# Altium PCB BT_Programmer_Shield.PcbDoc
Units mil, origin at the board's own origin, x right, y up, seen from the top; angles counter-clockwise.
Board outline 2100 x 2700 mil, 2 copper layers (Top Layer, Bottom Layer), stack 42.17 mil thick; 45 components, 38 nets, 207 pads, 63 vias.
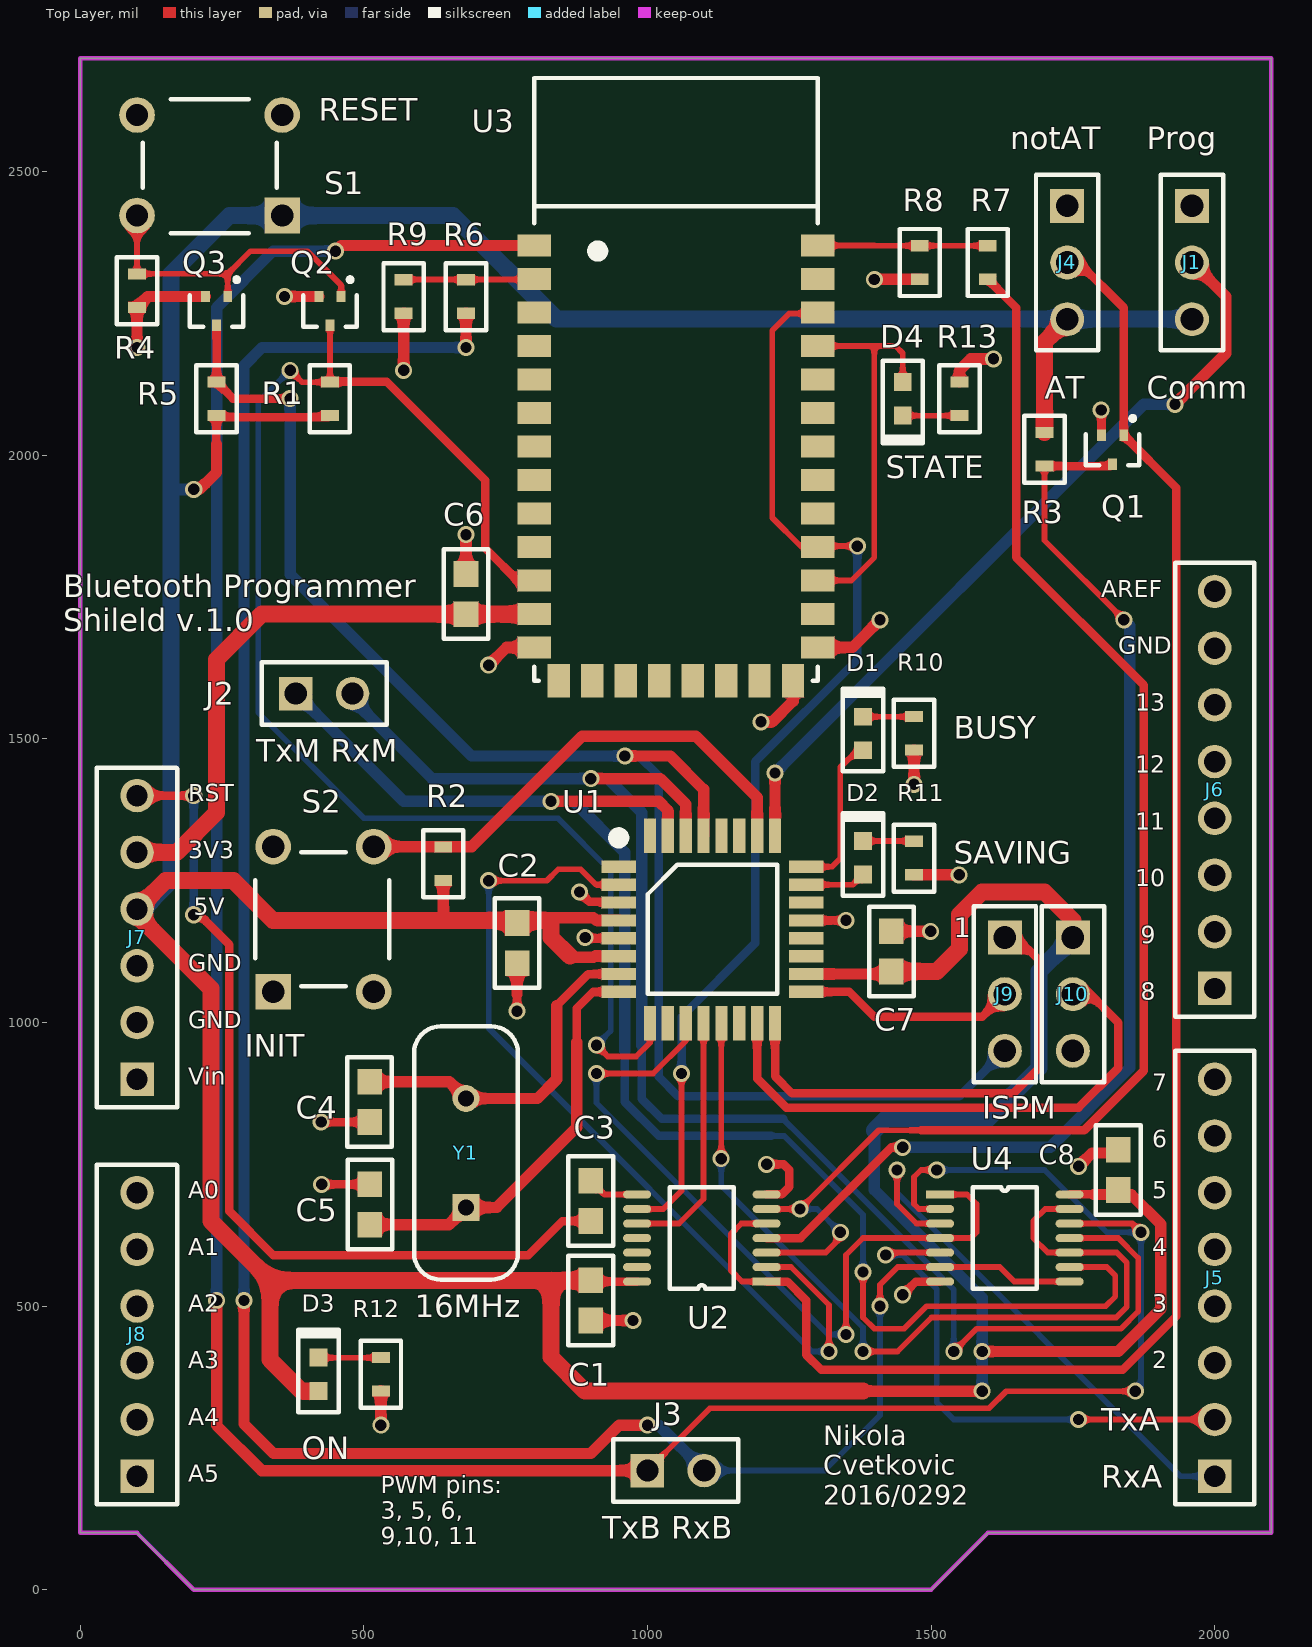
[diagram p0: Top Layer view]
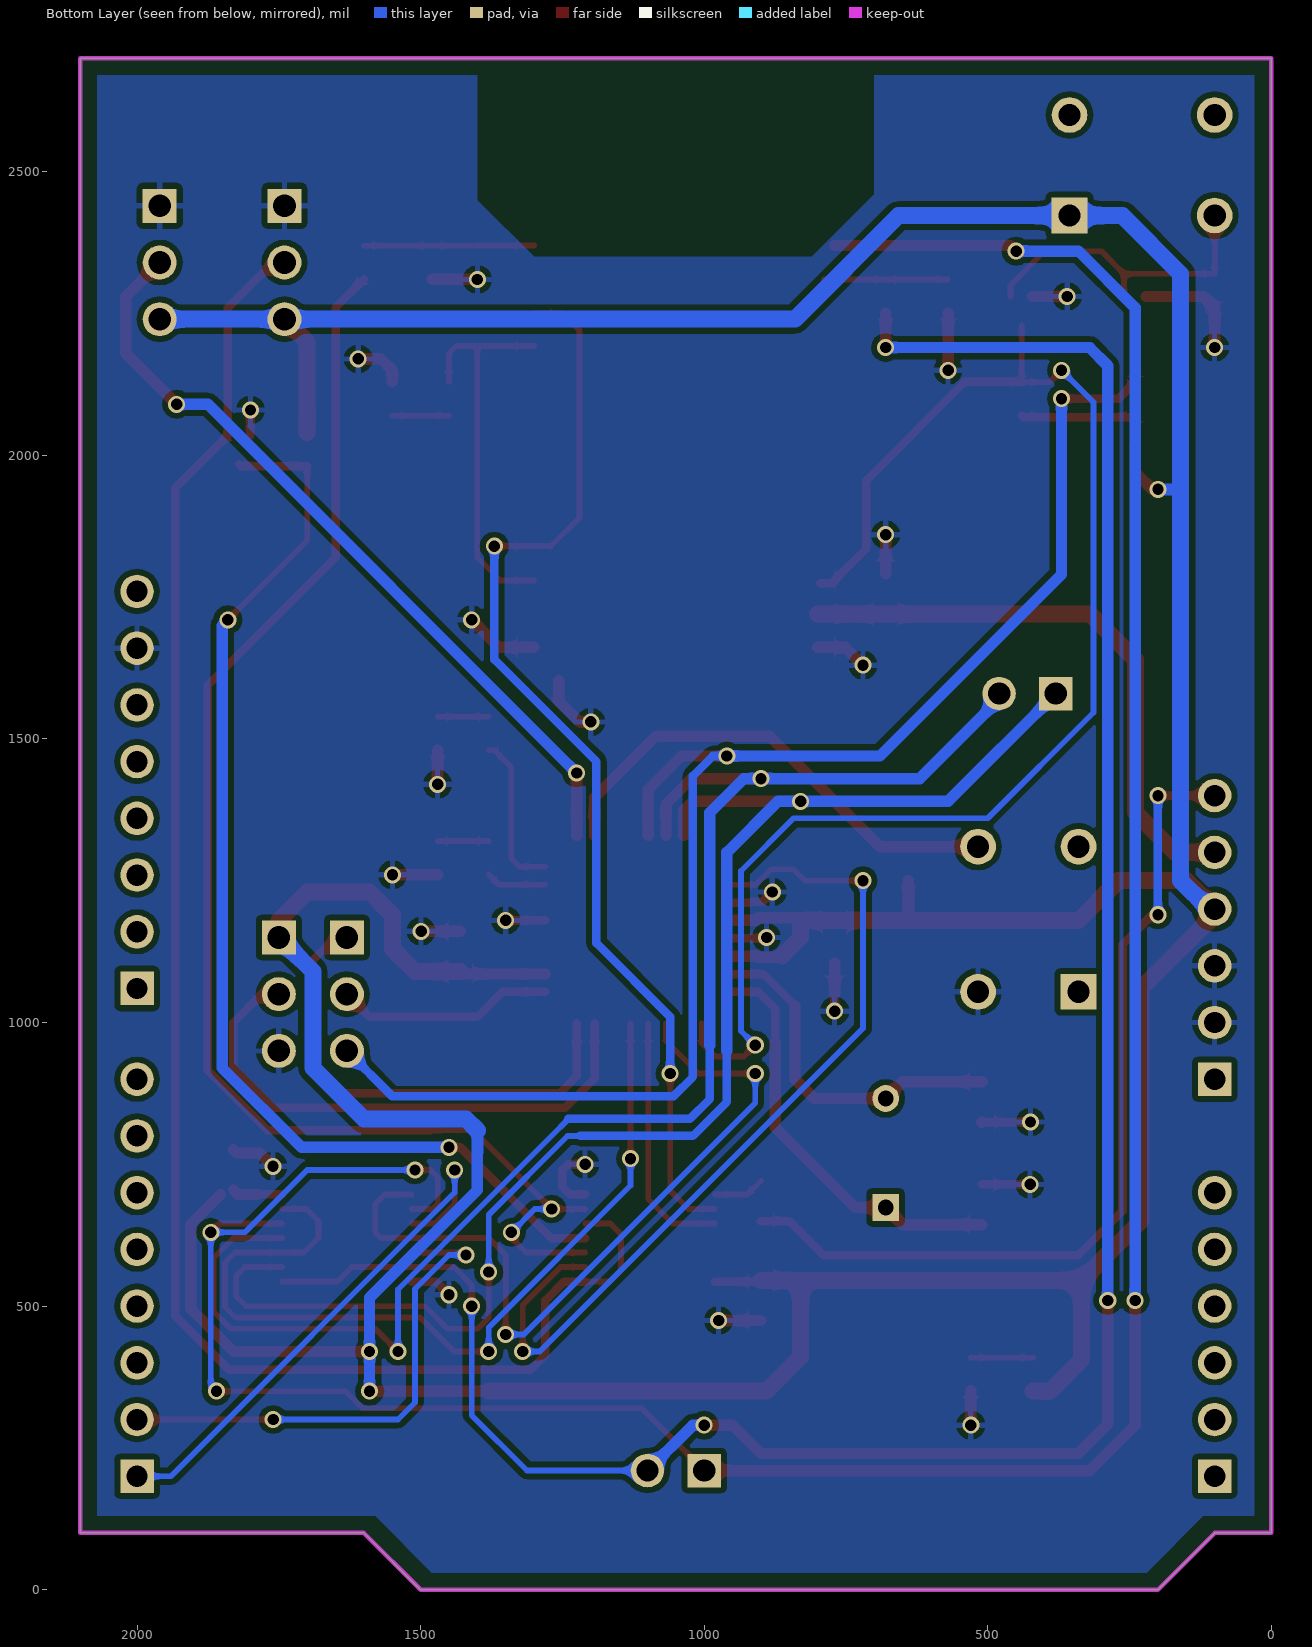
[diagram p1: Bottom Layer view, seen from below]
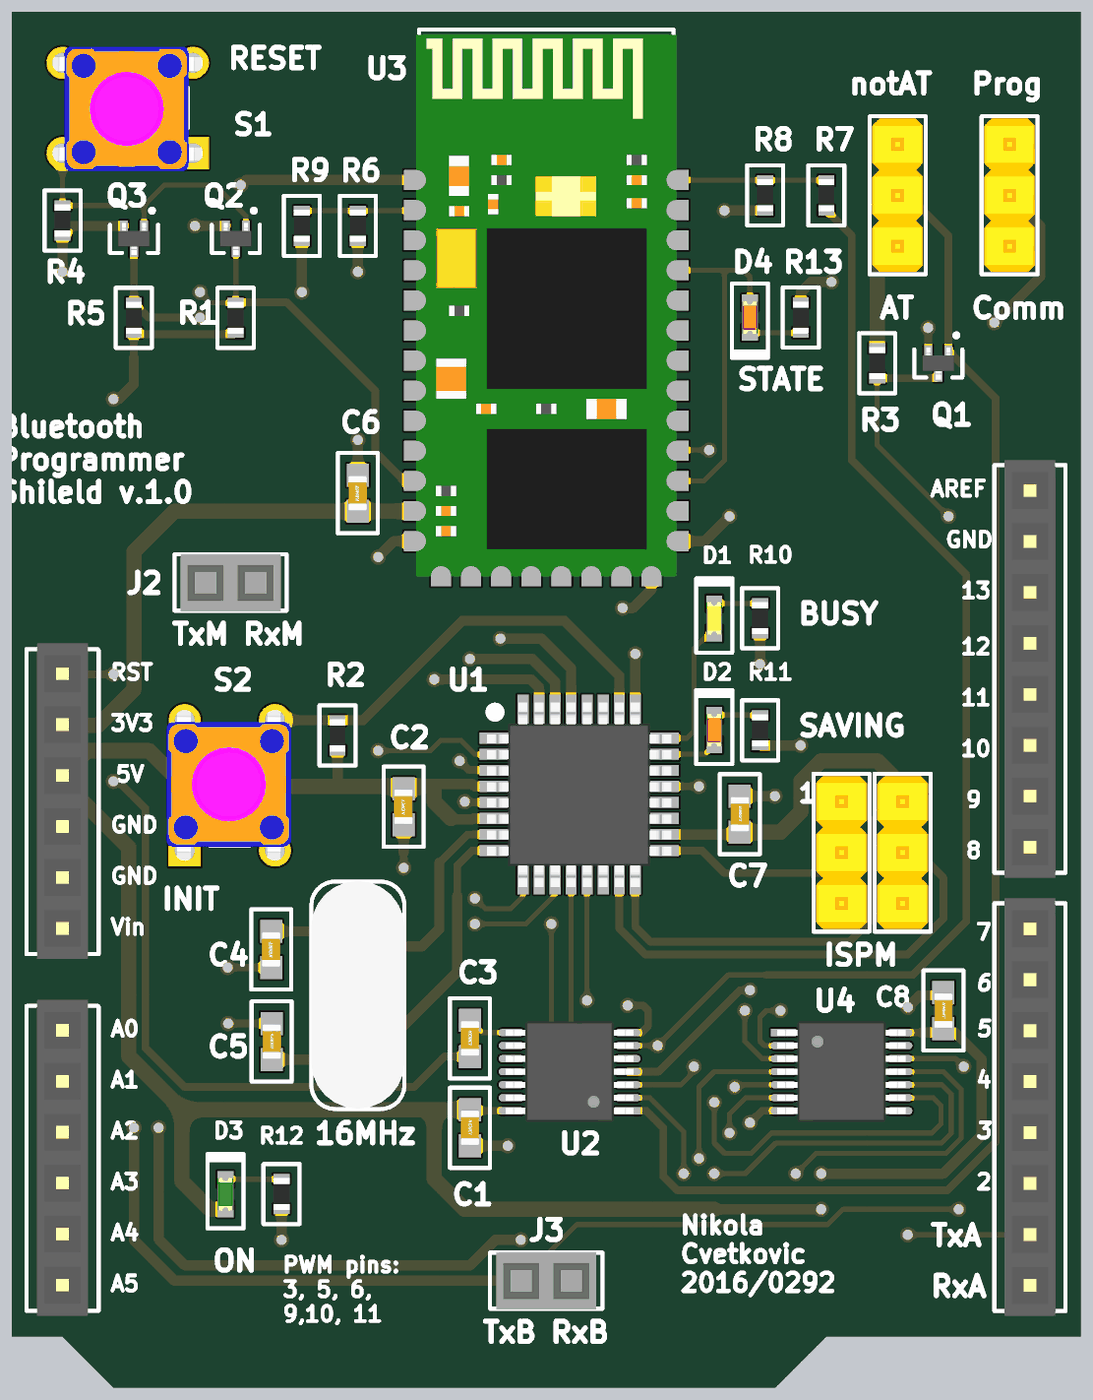
[diagram p2: 3D render of the assembled board from above, using the file's embedded part models]

## Layer stack, top to bottom
Top Solder: solder mask 0.4, Solder Resist, Dk 3.5
Top Layer: signal copper 1.4
Dielectric 1: dielectric 39.3701, FR-4, Dk 4.8
Bottom Layer: signal copper 1.4
Bottom Solder: solder mask 0.4, Solder Resist, Dk 3.5

## Board outline
0,2700 2100,2700 2100,100 1600,100 1500,0 200,0 100,100 0,100

## Design rules (kind name [scope] priority, off if disabled: settings)
Clearance [All] p1: gap=10 ignorepadtopadclearanceinfootprint=FALSE except(5: Arc-SMDPad Track-SMDPad SMDPad-SMDPad SMDPad-Fill SMDPad-Poly SMDPad-Region)
MinimumSolderMaskSliver [All] p1: minsoldermaskwidth=1
PolygonConnect [All] p1: connectstyle=Relief reliefconductorwidth=10 reliefentries=4 polygonreliefangle="90 Angle" airgapwidth=10
RoutingVias [All] p1: holewidth=20 width=30 viastyle="Through Hole" minholewidth=20 minwidth=30 maxholewidth=20 maxwidth=30
SolderMaskExpansion [All] p1: expansion=4
Width "Schematic Width Constraint_1" [InNet('+3V3')] p1: maxlimit=30 minlimit=15 preferedwidth=25
Width "Schematic Width Constraint" [InNet('+5V')] p2: maxlimit=30 minlimit=15 preferedwidth=20
Width [All] p3: maxlimit=20 minlimit=10 preferedwidth=15
29 further rules are at their usual default settings.

## Components (designator, comment, footprint, x,y, rotation, side; value= is the part's Value field where it differs from the comment)
C1 "0603" C0603 900,510 r270 top
C2 "0603" C0603 770,1140 r90 top
C3 "0603" C0603 900,685.43 r270 top
C4 "0603" C0603 510,860 r90 top
C5 "0603" C0603 510.63,679.13 r270 top
C6 "0603" C0603 680,1755.43 r90 top
C7 "0603" C0603 1430,1125.43 r270 top
C8 "0603" C0603 1830,740 r270 top
D1 "YELLOW" "LED 0603Y" 1380,1509.53 r270 top
D2 "RED" "LED 0603R" 1380,1290.47 r270 top
D3 "GREEN-On" "LED 0603G" 420,379.53 r270 top
D4 "RED" "LED 0603R" 1450,2100 r90 top
J1 "3x1 Header" HDR1X3 1960,2440 r0 top
J2 "2x1 Socket" FHDR1X2 430,1580 r90 top
J3 "2x1 Socket" FHDR1X2 1050,210 r90 top
J4 "3x1 Header" HDR1X3 1740,2440 r0 top
J5 "8x1 Socket" FHDR1X8 2000,200 r180 top
J6 "8x1 Socket" FHDR1X8 2000,1060 r180 top
J7 "6x1 Socket" FHDR1X6 100,900 r180 top
J8 "6x1 Socket" FHDR1X6 100,200 r180 top
J9 "3x1 Header" HDR1X3 1630,1150 r0 top
J10 "3x1 Header" HDR1X3 1750,1150 r0 top
Q1 "2N7002" "NMOS SOT523" 1820,2010 r270 top
Q2 "2N7002" "NMOS SOT523" 440.31,2254.61 r270 top
Q3 "2N7002" "NMOS SOT523" 240.31,2254.61 r270 top
R1 "0603" R0603 440,2099.53 r270 top
R2 "0603" R0603 640,1280 r270 top
R3 "0603" R0603 1700,2010.47 r90 top
R4 "0603" R0603 100,2290.47 r270 top
R5 "0603" R0603 240,2099.53 r270 top
R6 "0603" R0603 680,2280 r270 top
R7 "0603" R0603 1600,2340 r270 top
R8 "0603" R0603 1480,2340 r90 top
R9 "0603" R0603 570,2280 r90 top
R10 "0603" R0603 1470,1510 r90 top
R11 "0603" R0603 1470,1290 r90 top
R12 "0603" R0603 530,380 r90 top
R13 "0603" R0603 1550,2100 r270 top
S1 "Strd Switch" "SW DIP2" 355.91,2422.83 r180 top
S2 "Strd Switch" "SW DIP2" 340,1054.09 r90 top
U1 "ATMEGA8A-AU" "M8 32L_TQFP_PT" 949.29,1274.49 r0 top
U2 "4x1 3-S-Buff" "BUFF TSSOP-14" 1210,543.23 r180 top
U3 "HC-05" HC-05 800,2370 r0 top
U4 "4x1 3-S-Buff" "BUFF TSSOP-14" 1515.83,696.77 r0 top
Y1 "16MHz" "Y HC-49/US" 680,770 r90 top

## Footprints (in the part's own frame and the unit in brackets; to place one, negate y for a bottom-side part, rotate by r counter-clockwise, add the part's x,y. Pads: shape width x height; smd on the part's side, far side on the other; paste and mask are expansions set on the pad)
"BUFF TSSOP-14" [mm]
  rect 1.26x0.36 smd: 1(0,0)
  oval 1.26x0.36 smd: 2(0,-0.65) 3(0,-1.3) 4(0,-1.95) 5(0,-2.6) 6(0,-3.25) 7(0,-3.9) 8(5.8,-3.9) 9(5.8,-3.25) 10(5.8,-2.6) 11(5.8,-1.95) 12(5.8,-1.3) 13(5.8,-0.65) 14(5.8,0)
  silkscreen extent 1.46,-4.23 4.34,0.33, body extent -0.3,-4.45 6.1,0.55, height 1.11
C0603 [mm]
  rect 1.15x1.1 smd: 1(-0.9,0) 2(0.9,0)
  silkscreen extent -2,-1 2,1, body extent -0.87,-0.47 0.87,0.48, height 0.88
FHDR1X2 [mm]
  rect 1.5x1.5 hole 1: 1(0,1.27)
  round 1.5 hole 1: 2(0,-1.27)
  silkscreen extent -1.4,-2.8 1.4,2.8, body extent -1.44,-2.5 1.4,2.5, height 8.51
FHDR1X6 [mm]
  rect 1.5x1.5 hole 0.96: 1(0,0)
  round 1.5 hole 0.96: 2(0,-2.54) 3(0,-5.08) 4(0,-7.62) 5(0,-10.16) 6(0,-12.7)
  silkscreen extent -1.8,-13.95 1.8,1.25, body extent -1.26,-14.25 1.28,1.49, height 8.51
FHDR1X8 [mm]
  rect 1.5x1.5 hole 0.96: 1(0,0)
  round 1.5 hole 0.96: 2(0,-2.54) 3(0,-5.08) 4(0,-7.62) 5(0,-10.16) 6(0,-12.7) 7(0,-15.24) 8(0,-17.78)
  silkscreen extent -1.78,-19.07 1.78,1.26, body extent -1.27,-19.31 1.27,1.51, height 8.51
HC-05 [mm]
  rect 1.5x1 smd: 1(0,0) 2(0,-1.5) 3(0,-3) 4(0,-4.5) 5(0,-6) 6(0,-7.5) 7(0,-9) 8(0,-10.5) 9(0,-12) 10(0,-13.5) 11(0,-15) 12(0,-16.5) 13(0,-18) 22(12.7,-18) 23(12.7,-16.5) 24(12.7,-15) 25(12.7,-13.5) 26(12.7,-12) 27(12.7,-10.5) 28(12.7,-9) 29(12.7,-7.5) 30(12.7,-6) 31(12.7,-4.5) 32(12.7,-3) 33(12.7,-1.5) 34(12.7,0)
  rect 1x1.5 smd: 14(1.1,-19.5) 15(2.6,-19.5) 16(4.1,-19.5) 17(5.6,-19.5) 18(7.1,-19.5) 19(8.6,-19.5) 20(10.1,-19.5) 21(11.6,-19.5)
  silkscreen extent 0,-19.5 12.7,7.5, body extent -0.15,-19.75 12.85,7.25, height 4.32
HDR1X3 [mil]
  rect 60x60 hole 40: 1(0,0)
  round 60 hole 40: 2(0,-100) 3(0,-200)
  silkscreen extent -55,-255 55,55, body extent -50,-250 50,50, height 374
"LED 0603G" [mm]
  rect 0.8x0.8 smd: 1(-0.75,0) 2(0.75,0)
  silkscreen extent -2,-0.9 1.7,0.9, body extent -0.81,-0.4 0.81,0.4, height 0.6
"LED 0603R" [mm]
  rect 0.8x0.8 smd: 1(-0.75,0) 2(0.75,0)
  silkscreen extent -2,-0.9 1.7,0.9, body extent -0.81,-0.4 0.81,0.4, height 0.6
"LED 0603Y" [mm]
  rect 0.8x0.8 smd: 1(-0.75,0) 2(0.75,0)
  silkscreen extent -2,-0.9 1.7,0.9, body extent -0.81,-0.4 0.81,0.4, height 0.6
"M8 32L_TQFP_PT" [mm]
  rect 1.55x0.55 smd: 1(0,0) 2(0,-0.8) 3(0,-1.6) 4(0,-2.4) 5(0,-3.2) 6(0,-4) 7(0,-4.8) 8(0,-5.6) 17(8.4,-5.6) 18(8.4,-4.8) 19(8.4,-4) 20(8.4,-3.2) 21(8.4,-2.4) 22(8.4,-1.6) 23(8.4,-0.8) 24(8.4,0)
  rect 0.55x1.55 smd: 9(1.4,-7) 10(2.2,-7) 11(3,-7) 12(3.8,-7) 13(4.6,-7) 14(5.4,-7) 15(6.2,-7) 16(7,-7) 25(7,1.4) 26(6.2,1.4) 27(5.4,1.4) 28(4.6,1.4) 29(3.8,1.4) 30(3,1.4) 31(2.2,1.4) 32(1.4,1.4)
  silkscreen extent -0.22,-5.69 7.09,1.52, body extent -0.4,-7.42 8.8,1.78, height 1.2
"NMOS SOT523" [mm]
  rect 0.51x0.4 smd: 1(-0.645,0.5) 2(-0.645,-0.5) 3(0.645,0)
  silkscreen extent -1.5,-1.2 0.7,1.2, body extent -0.81,-0.8 0.81,0.8, height 0.81
R0603 [mm]
  rect 0.5x0.8 smd: 1(-0.75,0) 2(0.75,0)
  silkscreen extent -1.5,-0.9 1.5,0.9, body extent -0.8,-0.4 0.8,0.4, height 0.46
"SW DIP2" [mm]
  rect 1.6x1.6 hole 1: 1(0,0)
  round 1.6 hole 1: 2(0,-4.5) 3(6.5,-4.5) 4(6.5,0)
  silkscreen extent 0.25,-5.2 6.25,0.8, body extent -0.65,-5.3 7.25,0.9, height 5.01
"Y HC-49/US" [mm]
  rect 1.2x1.2 hole 0.7: 1(-2.44,0)
  round 1.2 hole 0.7: 2(2.44,0)
  silkscreen extent -5.68,-2.32 5.68,2.32, body extent -5.65,-2.33 5.7,2.32, height 4.01

## Part data
C1 C2 C6 C7 C8: library part C0603C104M4RACTU, "CAP CER 0.1UF 16V X7R 0603", Capacitance=0.1µF, Capacitance Tolerance="± 20%", Ceramic Capacitor Case="0603 [1608 Metric]", Dielectric Characteristic=X7R, Manufacturer=KEMET, Operating Temperature Max=125°C, Operating Temperature Min=-55°C, Supplier Part Number 1=399-1099-1-ND, Voltage Rating=16V, Automotive Qualification Standard=-, ComponentLink1Description=https://www.verical.com/server-webapp/html/getDatasheet?partID=66190&src-supplier=Verical, ComponentLink1URL=https://www.verical.com/server-webapp/html/getDatasheet?partID=66190&src-supplier=Verical, ComponentLink2Description=http://www.farnell.com/datasheets/2746055.pdf?src-supplier=Element14, ComponentLink2URL=http://www.farnell.com/datasheets/2746055.pdf?src-supplier=Element14, ComponentLink3Description=http://www.farnell.com/datasheets/2123765.pdf?src-supplier=Element14, ComponentLink3URL=http://www.farnell.com/datasheets/2123765.pdf?src-supplier=Element14, ComponentLink4Description=http://www.alliedelec.com/m/d/9bfe7773041ffe9d406e68bc7b377fdd.pdf?src-supplier=Allied+Electronics, ComponentLink4URL=http://www.alliedelec.com/m/d/9bfe7773041ffe9d406e68bc7b377fdd.pdf?src-supplier=Allied+Electronics, ComponentLink5Description=https://www.verical.com/server-webapp/html/getDatasheet?partID=302288&src-supplier=Verical, ComponentLink5URL=https://www.verical.com/server-webapp/html/getDatasheet?partID=302288&src-supplier=Verical, Manufacturer Part Number=C0603C104M4RACTU, MSL="MSL 1 - Unlimited", Packaging="Cut Tape", Pricing 1="1=0.1, 10=0.035, 50=0.0188, 100=0.0154, 500=0.011, 1000=0.0087 (USD)", Product Range="C Series", Stock 1=188304, Supplier 1=Digi-Key, SVHC="No SVHC (15-Jun-2015)"
C3 C4 C5: library part C0603C220J1GACTU, "CAP CER 22PF 100V C0G/NP0 0603", Capacitance="22 pF", Case Code - mm=1608, Case Height="0.8 mm", Case Length="1.6 mm", Dielectric="C0G (NP0)", Manufacturer=KEMET, Maximum Operating Temperature="+ 125 C", Minimum Operating Temperature="- 55 C", Operating Temperature Range="- 55 C to + 125 C", Package / Case="0603 (1608 metric)", Supplier Part Number 1=399-7874-1-ND, Temperature Coefficient / Code="+/- 30 PPM / C", Tolerance="5 %", Voltage Rating="100 V", Brand=Kemet, Case Code - in=0603, Case Width="0.8 mm", Category=Capacitors, Class=1, ComponentLink1Description=http://www.farnell.com/datasheets/2740975.pdf?src-supplier=Element14, ComponentLink1URL=http://www.farnell.com/datasheets/2740975.pdf?src-supplier=Element14, Dimensions="0.8 mm W x 1.6 mm L x 0.8 mm H", Dissipation Factor DF=0.5, Factory Pack Quantity=4000, Lead Spacing="0.7 mm", Manufacturer Part Number=C0603C220J1GACTU, Packaging=Reel, Part # Aliases=C0603C220J1GAC7867, Pricing 1="1=0.1, 10=0.057, 50=0.0312, 100=0.0255, 500=0.0182, 1000=0.0143 (USD)", Product="General Type MLCCs", Product Category="Multilayer Ceramic Capacitors MLCC - SMD/SMT", RoHS=Details, Series=C0603C, Stock 1=518345, Supplier 1=Digi-Key, Termination Style=SMD/SMT, Type="C0G Dielectric, Commercial", Voltage Rating DC="100 V"
D1: library part LTST-C190YKT, "LED YELLOW CLEAR CHIP SMD", Emitting Color=Amber, Forward Current="20 mA", Forward Voltage="2.6 V", Manufacturer="Vishay Lite-On", Operating Temperature Classification=Industrial, Operating Temp Range="-55C to 85C", Package Type="Chip Led", Power Dissipation="60 W", Reverse Voltage="5 V", Supplier Part Number 1=160-1184-1-ND, Test Current (It)="10 mA", Category=Optoelectronics, Chip Material=GaAsP, ComponentLink1Description=http://www.mouser.com/ds/2/239/ltstc190yktliteon-194900.pdf?src-supplier=Mouser, ComponentLink1URL=http://www.mouser.com/ds/2/239/ltstc190yktliteon-194900.pdf?src-supplier=Mouser, ComponentLink2Description=https://media.digikey.com/pdf/Data%20Sheets/Lite-On%20PDFs/LTST-C190YKT.pdf?src-supplier=Digi-Key, ComponentLink2URL=https://media.digikey.com/pdf/Data%20Sheets/Lite-On%20PDFs/LTST-C190YKT.pdf?src-supplier=Digi-Key, ComponentLink3Description=https://www.verical.com/server-webapp/html/getDatasheet?partID=242407&src-supplier=Verical, ComponentLink3URL=https://www.verical.com/server-webapp/html/getDatasheet?partID=242407&src-supplier=Verical, DELETED=Compliant, Dominant Wave Length="588 nm", High Brightness=No, Lens Dimensions="1.1X0.8X0.52 mm", Luminous Intensity=2.5mcd, Lum Intensity=2.5mcd, Main Category="Chip LED", Manufacturer Part Number=LTST-C190YKT, Mounting="Surface Mount", Number of  Elements=1, Packaging="Tape and Reel", Peak Wavelength="585 nm", Pin Count=2, Pricing 1="1=0.26, 10=0.192, 100=0.0909, 500=0.0606, 1000=0.0475 (USD)", Product Depth (mm)="1.6 mm", Product Height (mm)="1.1 mm", Product Length (mm)="3.2 mm", Rad Hardened=No, Shape Type=Rectangular, Stock 1=45611, Supplier 1=Digi-Key, Type=Uni-Color, Viewing Angle="130 deg"
D2 D4: library part LTST-C191KRKT, "On a Reel of 5000, 2.4 V Red LED 1608 (0603) SMD, Lite-On LTST-C191KRKT", Emitting Color=Red, Forward Current="30 mA", Forward Voltage="2.4 V", Manufacturer="Vishay Lite-On", Operating Temperature Classification=Industrial, Operating Temp Range="-55C to 85C", Package Type="Chip Led", Power Dissipation="75 W", Reverse Voltage="5 V", Supplier Part Number 1=160-1447-1-ND, Test Current (It)="20 mA", Category=Optoelectronics, Chip Material=AlGaInP, ComponentLink1Description=http://optoelectronics.liteon.com/upload/download/DS22-2000-223/LTST-C191KRKT.PDF?src-supplier=Digi-Key, ComponentLink1URL=http://optoelectronics.liteon.com/upload/download/DS22-2000-223/LTST-C191KRKT.PDF?src-supplier=Digi-Key, ComponentLink2Description=http://www1.futureelectronics.com/doc/LITE-ON/LTST-C191KRKT.pdf?src-supplier=Future+Electronics, ComponentLink2URL=http://www1.futureelectronics.com/doc/LITE-ON/LTST-C191KRKT.pdf?src-supplier=Future+Electronics, ComponentLink3Description=https://www.verical.com/server-webapp/html/getDatasheet?partID=141922&src-supplier=Verical, ComponentLink3URL=https://www.verical.com/server-webapp/html/getDatasheet?partID=141922&src-supplier=Verical, ComponentLink4Description=http://www.mouser.com/ds/2/239/LTST-C191KRKT-1140668.pdf?src-supplier=Mouser, ComponentLink4URL=http://www.mouser.com/ds/2/239/LTST-C191KRKT-1140668.pdf?src-supplier=Mouser, DELETED=Compliant, Dominant Wave Length="631 nm", High Brightness=Yes, Lens Dimensions="1.1X0.8X0.37 mm", Luminous Intensity=54mcd, Lum Intensity=54mcd, Main Category="Chip LED", Manufacturer Part Number=LTST-C191KRKT, Mounting="Surface Mount", Number of  Elements=1, Packaging="Tape and Reel", Peak Wavelength="639 nm", Pin Count=2, Pricing 1="1=0.26, 10=0.192, 100=0.0909, 500=0.0606, 1000=0.0475, 2500=0.0465 (USD)", Product Depth (mm)="0.8 mm", Product Height (mm)="0.55 mm", Product Length (mm)="1.6 mm", Rad Hardened=No, Shape Type=Rectangular, Stock 1=153604, Supplier 1=Digi-Key, Type=Uni-Color, Viewing Angle="130 deg"
D3: library part LTST-C191KGKT, "LED Uni-Color Green 574nm 2-Pin Chip LED T/R", Color=Green, High Power=No, Manufacturer="Vishay Lite-On", Maximum Forward Current (mA)=30, Maximum Forward Voltage (V)=2.4, Maximum Operating Temperature (°C)=85, Maximum Power Dissipation (mW)=75, Minimum Operating Temperature (°C)=-55, Package Height=0.55, Package Length=1.6, Package Width=0.8, Reverse Voltage (V)=5, Standard Package Name="Chip LED", Supplier Part Number 1=160-1446-1-ND, Test Current (mA)=20, Category=Optoelectronics, ComponentLink1Description=http://optoelectronics.liteon.com/upload/download/DS22-2000-228/LTST-C191KGKT.PDF?src-supplier=Digi-Key, ComponentLink1URL=http://optoelectronics.liteon.com/upload/download/DS22-2000-228/LTST-C191KGKT.PDF?src-supplier=Digi-Key, Dominant Wavelength (nm)=576.5(Max), ECCN (US)=EAR99, High Brightness=Yes, HTS=8541.40.20.00, Intensity=71mcd(Max), Lead Shape="No Lead", Lead Standoff=No, LED Material=AllnGaP, Lens Appearance=Colorless, Lens Shape Type=Rectangular, Manufacturer Part Number=LTST-C191KGKT, Mounting="Surface Mount", Mounting Orientation="Top Mount", Number of LEDs=1, Packaging="Tape and Reel", Part Status=Active, PCB changed=2, Peak Wavelength (nm)=574, Pin Count=2, Pricing 1="1=0.26, 10=0.192, 100=0.0909, 500=0.0606, 1000=0.0475, 2500=0.0465 (USD)", Product Category="Chip LED", Stock 1=745051, Supplier 1=Digi-Key, Supplier Color=Green, Supplier Package="Chip LED", Type=Uni-Color, Viewing Angle (°)=130
J1 J4 J9 J10: library part 3-644456-3, "CONN HEADER VERT 3POS 2.54MM", Color=Natural, Manufacturer="TE Connectivity", Standard Package=15,000, Supplier Part Number 1=A31113-ND, 3D Model=3-644456-3.pdf, Catalog Drawings="64 Series Strt Post Header", Category=Connectors, ComponentLink1Description=https://www.te.com/commerce/DocumentDelivery/DDEController?Action=srchrtrv&DocNm=644456&DocType=Customer+Drawing&DocLang=English&src-supplier=Digi-Key, ComponentLink1URL=https://www.te.com/commerce/DocumentDelivery/DDEController?Action=srchrtrv&DocNm=644456&DocType=Customer+Drawing&DocLang=English&src-supplier=Digi-Key, ComponentLink2Description=https://www.alliedelec.com/m/d/fdd166ad3a7836eb9c030d72aa4949d7.pdf?src-supplier=Allied+Electronics, ComponentLink2URL=https://www.alliedelec.com/m/d/fdd166ad3a7836eb9c030d72aa4949d7.pdf?src-supplier=Allied+Electronics, ComponentLink3Description=https://www.verical.com/server-webapp/html/getDatasheet?partID=36881&src-supplier=Verical, ComponentLink3URL=https://www.verical.com/server-webapp/html/getDatasheet?partID=36881&src-supplier=Verical, ComponentLink4Description=http://www.te.com/commerce/DocumentDelivery/DDEController?Action=showdoc&DocId=Data+Sheet%7F82056_MTA%7F0608%7Fpdf%7FEnglish%7FENG_DS_82056_MTA_0608.pdf%7F3-644456-3&src-supplier=Future+Electronics, ComponentLink4URL=http://www.te.com/commerce/DocumentDelivery/DDEController?Action=showdoc&DocId=Data+Sheet%7F82056_MTA%7F0608%7Fpdf%7FEnglish%7FENG_DS_82056_MTA_0608.pdf%7F3-644456-3&src-supplier=Future+Electronics, ComponentLink5Description=http://www.jameco.com/Jameco/Products/ProdDS/1967934.pdf?src-supplier=Jameco, ComponentLink5URL=http://www.jameco.com/Jameco/Products/ProdDS/1967934.pdf?src-supplier=Jameco, ComponentLink6Description=http://www.onlinecomponents.com/productFiles/mf-AMP/8852eng_ds_82056_mta_0608.pdf?src-supplier=Onlinecomponents.com, ComponentLink6URL=http://www.onlinecomponents.com/productFiles/mf-AMP/8852eng_ds_82056_mta_0608.pdf?src-supplier=Onlinecomponents.com, Connector Type="Header, Unshrouded", Contact Finish=Tin, Contact Finish Thickness="150µin (3.81µm)", Contact Mating Length="0.295\" (7.49mm)", Contact Type="Male Pin", Dynamic Catalog="MTA-100 Series", Family="Rectangular Connectors - Headers, Male Pins", Featured Product="MTA Connectors", Manufacturer Part Number=3-644456-3, Mating Products="3-644872-3-ND / - CONN RCPT 3POS 24AWG .100 WHITE / 3-644514-3-ND / - CONN RCPT 3POS 28AWG .100 GREEN / 3-644513-3-ND / - CONN RCPT 3POS 26AWG .100 BLUE / 3-644512-3-ND / - CONN RCPT 3POS 24AWG .100 WHITE / 3-641314-3-ND / - CONN RCPT 3POS 28AWG .100 GREEN / 3-641313-3-ND / - CONN RCPT 3POS 26AWG .100 BLUE / 3-641311-3-ND / - CONN RCPT 3POS 22AWG .100 RED / 3-640471-3-ND / - CONN RCPT 3POS 28AWG .100 GREEN / 3-640470-3-ND / - CONN RCPT 3POS 26AWG .100 BLUE / 3-640469-3-ND / - CONN RCPT 3POS 24AWG .100 WHITE / More.", Mounting Type="Through Hole", Number of Positions=3, Number of Positions Loaded=All, Number of Rows=1, Other Names="3-644456-3-ND / A31113", Packaging=Bulk, Pitch="0.100\" (2.54mm)", Pricing 1="1=0.27, 10=0.26, 100=0.1817, 500=0.1558, 1000=0.1298, 5000=0.1113, 10000=0.1038 (USD)", RoHS Information="3-644456-3 Statement of Compliance", Series=MTA-100, Stock 1=6505, Supplier 1=Digi-Key, Termination=Solder
J2 J3: library part SSW-102-02-T-S, "CONN RCPT 2POS 0.1 TIN PCB", Manufacturer=Samtec, Supplier Part Number 1=SAM1222-02-ND, Category=Connectors, ComponentLink1Description=http://suddendocs.samtec.com/prints/ssw-s.pdf?src-supplier=Digi-Key, ComponentLink1URL=http://suddendocs.samtec.com/prints/ssw-s.pdf?src-supplier=Digi-Key, Contact Plating="Tin Over Nickel", Gender=SKT, Manufacturer Part Number=SSW-102-02-T-S, Number of Contacts=2, Number of Rows=1, Packaging=Bulk, Pitch="2.54 mm", Pricing 1="1=0.26, 10=0.247, 25=0.2116, 50=0.18, 100=0.1729, 250=0.1552, 500=0.1482 (USD)", Rad Hard=No, Stock 1=628, Supplier 1=Digi-Key, Termination Method=Solder, Type="Socket Strip"
J5 J6: library part 5-535541-6, "CONN RECEPT 8POS .100 VERT GOLD", Color=Black, Manufacturer="TE Connectivity", Standard Package=28, Supplier Part Number 1=A32921-ND, 3D Model=5-535541-6.pdf, Catalog Drawings="MOD IV Vertical Mount Low Profile", Category=Connectors, ComponentLink1Description=https://www.te.com/commerce/DocumentDelivery/DDEController?Action=srchrtrv&DocNm=535541&DocType=Customer+Drawing&DocLang=English&src-supplier=Digi-Key, ComponentLink1URL=https://www.te.com/commerce/DocumentDelivery/DDEController?Action=srchrtrv&DocNm=535541&DocType=Customer+Drawing&DocLang=English&src-supplier=Digi-Key, ComponentLink2Description=http://www.tycoelectronics.com/commerce/DocumentDelivery/DDEController?Action=srchrtrv&DocNm=1307819_SECTION_5&DocType=Catalog+Section&DocLang=English&src-supplier=Element14, ComponentLink2URL=http://www.tycoelectronics.com/commerce/DocumentDelivery/DDEController?Action=srchrtrv&DocNm=1307819_SECTION_5&DocType=Catalog+Section&DocLang=English&src-supplier=Element14, ComponentLink3Description=http://www.onlinecomponents.com/productFiles/mf-AMP/eng_ds_1307819_ampmodu_0811.pdf?src-supplier=Onlinecomponents.com, ComponentLink3URL=http://www.onlinecomponents.com/productFiles/mf-AMP/eng_ds_1307819_ampmodu_0811.pdf?src-supplier=Onlinecomponents.com, Connector Type=Receptacle, Contact Finish=Gold, Contact Finish Thickness="30µin (0.76µm)", Contact Type="Female Socket", Dynamic Catalog="AMPMODU Mod IV Series", Family="Rectangular Connectors - Headers, Receptacles, Female Sockets", Featured Product="AMPMODU Connectors", Manufacturer Part Number=5-535541-6, Mating Products="826646-8-ND / - CONN HEADER BRKWAY 8POS STR GOLD / 5-146282-8-ND / - CONN HEADER BRKWAY 8POS SGL .100 / 146285-8-ND / - CONN HEADER BRKWAY 8POS SGL .100 / 146281-8-ND / - CONN HEADER BRKWAY 8POS SGL .100 / 104349-6-ND / - CONN HEADER 8POS R/A TIN / A34264-08-ND / - CONN HEADR BRKWAY .100 08POS R/A / A34262-08-ND / - CONN HEADR BRKWAY .100 08POS R/A / A34261-08-ND / - CONN HEADR BRKWAY .100 08POS R/A / A34260-08-ND / - CONN HEADR BRKWAY .100 08POS R/A / A34256-08-ND / - CONN HDR BRKWAY .100 08POS VERT / More...", Mounting Type="Through Hole", Number of Positions=8, Number of Positions Loaded=All, Number of Rows=1, Other Names=A32921, Packaging=Tube, Pitch="0.100\" (2.54mm)", Pricing 1="1=2, 10=1.813, 100=1.554, 500=1.295, 1000=1.11, 5000=0.9842, 10000=0.962 (USD)", RoHS Information="5-535541-6 Statement of Compliance", Series="AMPMODU Mod IV", Stock 1=1412, Supplier 1=Digi-Key, Termination=Solder
J7 J8: library part 5-534237-4, "Conn Socket Strip SKT 6 POS 2.54mm Solder ST Thru-Hole", Color=Black, Manufacturer="TE Connectivity", Standard Package=37, Supplier Part Number 1=A32907-ND, Catalog Drawings="MOD IV Vertical Mount", Category=Connectors, ComponentLink1Description=http://www.te.com/commerce/DocumentDelivery/DDEController?Action=showdoc&DocId=Catalog+Section%7F1307819_SECTION_5%7F0908%7Fpdf%7FEnglish%7FENG_CS_1307819_SECTION_5_0908.pdf%7F5-534237-4&src-supplier=Future+Electronics, ComponentLink1URL=http://www.te.com/commerce/DocumentDelivery/DDEController?Action=showdoc&DocId=Catalog+Section%7F1307819_SECTION_5%7F0908%7Fpdf%7FEnglish%7FENG_CS_1307819_SECTION_5_0908.pdf%7F5-534237-4&src-supplier=Future+Electronics, ComponentLink2Description=https://www.te.com/commerce/DocumentDelivery/DDEController?Action=srchrtrv&DocNm=534237&DocType=Customer+Drawing&DocLang=English&src-supplier=Digi-Key, ComponentLink2URL=https://www.te.com/commerce/DocumentDelivery/DDEController?Action=srchrtrv&DocNm=534237&DocType=Customer+Drawing&DocLang=English&src-supplier=Digi-Key, ComponentLink3Description=http://www.te.com/commerce/DocumentDelivery/DDEController?Action=srchrtrv&DocNm=1307819_AMPMODU&DocType=DS&DocLang=English&s_cid=1046&src-supplier=Avnet, ComponentLink3URL=http://www.te.com/commerce/DocumentDelivery/DDEController?Action=srchrtrv&DocNm=1307819_AMPMODU&DocType=DS&DocLang=English&s_cid=1046&src-supplier=Avnet, Connector Type=Receptacle, Contact Finish=Gold, Contact Finish Thickness="30µin (0.76µm)", Contact Type="Female Socket", Dynamic Catalog="AMPMODU Mod IV Series", Family="Rectangular Connectors - Headers, Receptacles, Female Sockets", Featured Product="AMPMODU Connectors", Manufacturer Part Number=5-534237-4, Mating Products="3-104349-0-ND / - CONN HDR BRKAY 6POS R/A .100 TIN / 5-146285-6-ND / - CONN HEADER BRKWAY 6POS SGL .100 / 5-146280-6-ND / - CONN HEADER BRKWAY 6POS SGL .100 / 3-103336-7-ND / - CONN HEADER .100 6POS VERT GOLD / 146133-4-ND / - CONN HEADER BRKAWAY 6POS TIN / 146129-4-ND / - CONN HEADER BRKAWAY 6POS .100 / 146132-4-ND / - CONN HEADER B/A 6POS SL PCB TIN / 104346-4-ND / - CONN HEADER 6POS VERT PCB TIN / 87348-6-ND / - CONN HEADER .100 6POS VERT TIN / A34265-06-ND / - CONN HEADR BRKWAY .100 06POS R/A / More...", Mounting Type="Through Hole", Number of Positions=6, Number of Positions Loaded=All, Number of Rows=1, Other Names=A32907, Packaging=Tube, Pitch="0.100\" (2.54mm)", Pricing 1="1=1.62, 10=1.47, 100=1.26, 500=1.05, 1000=0.9, 5000=0.798, 10000=0.78 (USD)", RoHS Information="5-534237-4 Statement of Compliance", Series="AMPMODU Mod IV", Stock 1=947, Supplier 1=Digi-Key, Termination=Solder
Q1 Q2 Q3: library part 2N7002T-7-F, "MOSFET N-Channel 60V 0.115A SOT523", Id - Continuous Drain Current="115 mA", Manufacturer=Diodes, Maximum Operating Temperature="+ 150 C", Minimum Operating Temperature="- 55 C", Package / Case=SOT-523-3, Pd - Power Dissipation="150 mW", Rds On - Drain-Source Resistance="4.4 Ohms", Supplier Part Number 1=2N7002T-FDICT-ND, Vds - Drain-Source Breakdown Voltage="60 V", Vgs - Gate-Source Voltage="20 V", Brand="Diodes Incorporated", Channel Mode=Enhancement, ComponentLink1Description=http://docs-europe.electrocomponents.com/webdocs/0e49/0900766b80e493a7.pdf?src-supplier=Allied+Electronics, ComponentLink1URL=http://docs-europe.electrocomponents.com/webdocs/0e49/0900766b80e493a7.pdf?src-supplier=Allied+Electronics, ComponentLink2Description=https://www.diodes.com/assets/Datasheets/ds30301.pdf?src-supplier=Digi-Key, ComponentLink2URL=https://www.diodes.com/assets/Datasheets/ds30301.pdf?src-supplier=Digi-Key, ComponentLink3Description=https://www.verical.com/server-webapp/html/getDatasheet?partID=141065&src-supplier=Verical, ComponentLink3URL=https://www.verical.com/server-webapp/html/getDatasheet?partID=141065&src-supplier=Verical, ComponentLink4Description=http://www.diodes.com/datasheets/ds30301.pdf?src-supplier=Avnet, ComponentLink4URL=http://www.diodes.com/datasheets/ds30301.pdf?src-supplier=Avnet, ComponentLink5Description=http://www.farnell.com/datasheets/1915455.pdf?src-supplier=Element14, ComponentLink5URL=http://www.farnell.com/datasheets/1915455.pdf?src-supplier=Element14, ComponentLink6Description=http://www.diodes.com/_files/datasheets/ds30301.pdf?src-supplier=Future+Electronics, ComponentLink6URL=http://www.diodes.com/_files/datasheets/ds30301.pdf?src-supplier=Future+Electronics, ComponentLink7Description=http://www.diodes.com/datasheets/ds30301.pdf?src-supplier=Avnet+Europe, ComponentLink7URL=http://www.diodes.com/datasheets/ds30301.pdf?src-supplier=Avnet+Europe, ComponentLink8Description=http://www.jameco.com/Jameco/Products/ProdDS/1538460.pdf?src-supplier=Jameco, ComponentLink8URL=http://www.jameco.com/Jameco/Products/ProdDS/1538460.pdf?src-supplier=Jameco, Configuration=Single, Factory Pack Quantity=3000, Forward Transconductance - Min="0.08 S", Height="0.75 mm", Length="1.6 mm", Manufacturer Part Number=2N7002T-7-F, Mounting Style=SMD/SMT, Number of Channels="1 Channel", Packaging=Reel, Pricing 1="1=0.38, 10=0.283, 25=0.2476, 100=0.1343, 500=0.1096, 1000=0.0813 (USD)", Product="MOSFET Small Signal", Product Category=MOSFET, RoHS=True, Series=2N7002, Stock 1=422299, Supplier 1=Digi-Key, Technology=Si, Transistor Polarity=N-Channel, Transistor Type="1 N-Channel", Type="Enhancement Mode Field Effect Transistor", Typical Turn-Off Delay Time="11 ns", Typical Turn-On Delay Time="7 ns", Unit Weight="0.000071 oz", Width="0.8 mm"
R1 R3 R5 R6 R7 R10 R11 R12 R13: library part CRGP0603F220R, "CRGP 0603 220R 1%", Manufacturer="TE Connectivity", Operating Temperature="-55°C ~ 155°C", Package / Case="0603 (1608 Metric)", Power (Watts)="0.25W, 1/4W", Resistance=220R, Supplier Part Number 1=A130408CT-ND, Temperature Coefficient=±100ppm/°C, Tolerance=±1%, Categories=Resistors, ComponentLink1Description=https://www.te.com/commerce/DocumentDelivery/DDEController?Action=srchrtrv&DocNm=9-1773463-9&DocType=DS&DocLang=English&src-supplier=Digi-Key, ComponentLink1URL=https://www.te.com/commerce/DocumentDelivery/DDEController?Action=srchrtrv&DocNm=9-1773463-9&DocType=DS&DocLang=English&src-supplier=Digi-Key, Composition="Thick Film", Failure Rate=-, Features="Pulse Withstanding", Height - Seated (Max)="0.022 (0.55mm)", Manufacturer Part Number=CRGP0603F220R, Number of Terminations=2, Packaging="Cut Tape (CT)", Part Status=Active, Pricing 1="1=0.14, 10=0.121, 100=0.0473, 1000=0.0198, 2500=0.0182 (USD)", Series=CRGP, Size / Dimension="0.063 L x 0.031 W (1.60mm x 0.80mm)", Stock 1=49528, Supplier 1=Digi-Key, Supplier Device Package=0603
R2 R4: library part ESR03EZPF1002, "RES SMD 10K OHM 1% 1/4W 0603", Manufacturer=Rohm, Operating Temperature="-55°C ~ 155°C", Package / Case="0603 (1608 Metric)", Power (Watts)="0.25W, 1/4W", Resistance (Ohms)=10k, Standard Package=1, Supplier Part Number 1=RHM10KADCT-ND, Temperature Coefficient=±100ppm/°C, Tolerance=±1%, Category=Resistors, ComponentLink1Description=https://www.rohm.com/datasheet/ESR01MZPF/esr-e?src-supplier=Digi-Key, ComponentLink1URL=https://www.rohm.com/datasheet/ESR01MZPF/esr-e?src-supplier=Digi-Key, Composition="Thick Film", EDA / CAD Models="Download from Accelerated Designs", Family="Chip Resistor - Surface Mount", Featured Product="ROHM Chip Resistors", Features="Automotive AEC-Q200, Pulse Withstanding", Height="0.022\" (0.55mm)", Manufacturer Part Number=ESR03EZPF1002, Number of Terminations=2, Online Catalog="ESR03 Series", Other Names=RHM10KADDKR, Packaging=Digi-Reel®, Pricing 1="1=0.12, 10=0.11, 100=0.0424, 1000=0.0187, 2500=0.0161 (USD)", Product Training Modules="Resistor Products Overview", Series=ESR, Size / Dimension="0.063\" L x 0.031\" W (1.60mm x 0.80mm)", Stock 1=173014, Supplier 1=Digi-Key, Supplier Device Package="0603 (1608 Metric)"
R8 R9: library part ESR03EZPJ471, "ROHM - ESR03EZPJ471 - SMD Chip Resistor, Anti-Surge, 0603 [1608 Metric], 470 ohm, ESR Series, 150 V, Thick Film, 250 mW", Manufacturer=Rohm, Operating Temperature="-55°C ~ 155°C", Package / Case="0603 (1608 Metric)", Power (Watts)="0.25W, 1/4W", Resistance=470R, Supplier Part Number 1=RHM470DCT-ND, Temperature Coefficient=±200ppm/°C, Tolerance=±5%, Categories=Resistors, ComponentLink1Description=http://www.farnell.com/datasheets/2611941.pdf?src-supplier=Element14, ComponentLink1URL=http://www.farnell.com/datasheets/2611941.pdf?src-supplier=Element14, ComponentLink2Description=http://www.farnell.com/datasheets/2611941.pdf?src-supplier=Farnell, ComponentLink2URL=http://www.farnell.com/datasheets/2611941.pdf?src-supplier=Farnell, ComponentLink3Description=https://www.rohm.com/datasheet/ESR01MZPF/esr-e?src-supplier=Digi-Key, ComponentLink3URL=https://www.rohm.com/datasheet/ESR01MZPF/esr-e?src-supplier=Digi-Key, ComponentLink4Description=http://www.farnell.com/datasheets/2611941.pdf?src-supplier=Newark, ComponentLink4URL=http://www.farnell.com/datasheets/2611941.pdf?src-supplier=Newark, Composition="Thick Film", Failure Rate=-, Features="Automotive AEC-Q200, Pulse Withstanding", Height - Seated (Max)="0.022 (0.55mm)", Manufacturer Part Number=ESR03EZPJ471, Number of Terminations=2, Packaging="Tape & Reel (TR)", Part Status=Active, Pricing 1="1=0.1, 10=0.079, 100=0.0303, 1000=0.0133, 2500=0.0115 (USD)", Series=ESR, Size / Dimension="0.063 L x 0.031 W (1.60mm x 0.80mm)", Stock 1=23164, Supplier 1=Digi-Key, Supplier Device Package=0603
S1 S2: library part 1825910-6, "SWITCH TACTILE SPST-NO 0.05A 24V", Actuator Color=Black, Contact Rating @ Voltage=0.05A@24VDC, Dielectric Strength="500 VAC", Manufacturer="TE Connectivity Alcoswitch", Maximum AC Voltage Rating=N/A, Maximum Contact Resistance="100 mOhm", Maximum DC Voltage Rating="24 V", Minimum Insulation Resistance="100 MOhm", Operating Temperature="-35 to 85 C", Supplier Part Number 1=450-1650-ND, Actuator Length="1.4 mm", Actuator Material="Polybutylene Terephthalate", Actuator Style="Round Button", Base Material=N/A, Body Orientation=Straight, Bushing Type=Unthreaded, Category=Switches, ComponentLink1Description=http://www.onlinecomponents.com/productFiles/mf-AMP/1825910-6rqpn1825910-6.pdf?src-supplier=Onlinecomponents.com, ComponentLink1URL=http://www.onlinecomponents.com/productFiles/mf-AMP/1825910-6rqpn1825910-6.pdf?src-supplier=Onlinecomponents.com, ComponentLink2Description=http://www.te.com/commerce/DocumentDelivery/DDEController?Action=srchrtrv&DocNm=1825910&DocType=Customer+Drawing&DocLang=English&src-supplier=Verical, ComponentLink2URL=http://www.te.com/commerce/DocumentDelivery/DDEController?Action=srchrtrv&DocNm=1825910&DocType=Customer+Drawing&DocLang=English&src-supplier=Verical, Contact Material="Copper Alloy", Contact Plating=Silver, Dimension="5.99 x 5 mm", Electrical Life="100000 Cycles", Family=1825910, Function="Momentary Contact", Housing Material=N/A, Illumination=N/R, Manufacturer Part Number=1825910-6, Mechanical Life="100000 Cycles", Mounting="Through Hole", Packaging=N/A, Part No=1825910-6, Pole Throw Configuration=SPST, Pricing 1="1=0.1, 10=0.101, 25=0.0956, 100=0.087, 250=0.0818, 500=0.0748, 1000=0.0627, 2500=0.0609, 5000=0.0574 (USD)", Product Weight=N/A, RoHS=Yes, Seal Description=N/A, Seal Location=N/A, Stock 1=104984, Supplier 1=Digi-Key, Switch Configuration="OFF (ON)", Terminal Type="PC Pins", Thread Size=N/R
U1: "MCU 8-bit ATmega AVR RISC 8KB Flash 3.3V/5V 32-Pin TQFP", Manufacturer=Microchip, Supplier Part Number 1=ATMEGA8A-AU-ND, Category="Integrated Circuits (ICs)", Manufacturer Part Number=ATMEGA8A-AU, Pricing 1="1=1.91, 25=1.75, 100=1.59 (USD)", Stock 1=786, Supplier 1=Digi-Key
U2 U4: library part MC74ACT125DTR2G, "IC BUFF TRI-ST QD N-INV 14TSSOP", High Level Output Current=-24mA, Low Level Output Current=24mA, Manufacturer="ON Semiconductor", Operating Supply Voltage (Max)=5.5V, Operating Supply Voltage (Min)=4.5V, Operating Supply Voltage (Typ)=5V, Operating Temperature Classification=Industrial, Operating Temp Range="-40C to 85C", Package Type=TSSOP, Quiescent Current=8uA, Supplier Part Number 1=MC74ACT125DTR2GOSCT-ND, ComponentLink1Description=http://www.onsemi.com/pub_link/Collateral/MC74AC125-D.PDF?src-supplier=Digi-Key, ComponentLink1URL=http://www.onsemi.com/pub_link/Collateral/MC74AC125-D.PDF?src-supplier=Digi-Key, ComponentLink2Description=http://www.onsemi.cn/pub_link/Collateral/MC74AC125-D.PDF?src-supplier=Avnet, ComponentLink2URL=http://www.onsemi.cn/pub_link/Collateral/MC74AC125-D.PDF?src-supplier=Avnet, ComponentLink3Description=http://www.onsemi.cn/pub_link/Collateral/MC74AC125-D.PDF?src-supplier=Avnet+Europe, ComponentLink3URL=http://www.onsemi.cn/pub_link/Collateral/MC74AC125-D.PDF?src-supplier=Avnet+Europe, ComponentLink4Description=https://www.verical.com/server-webapp/html/getDatasheet?partID=148069&src-supplier=Verical, ComponentLink4URL=https://www.verical.com/server-webapp/html/getDatasheet?partID=148069&src-supplier=Verical, Logical Function="Buffer/Line Driver", Logic Family=ACT, Manufacturer Part Number=MC74ACT125DTR2G, Mounting="Surface Mount", Number of Channels=4, Number of  Elements=4, Number of Inputs=4, Number of Outputs=4, Output Type=3-State, Packaging="Tape and Reel", Pin Count=14, Polarity=Non-Inverting, Pricing 1="1=0.4, 10=0.342, 25=0.3188, 100=0.2551, 250=0.2369, 500=0.2004, 1000=0.1549 (USD)", Propagation Delay Time=10.5ns, Stock 1=3201, Supplier 1=Digi-Key, Technology=CMOS
U3: library part "HC-05 V2.0+EDR Bluetooth module"
Y1: library part ECS-160-20-4X, "CRYSTAL 16.0000MHZ 20PF T/H", Case Height="3.5 mm", Case Length="11.35 mm", Case Width="4.65 mm", Frequency="16 MHz", Frequency Stability="50 PPM", Load Capacitance="20 pF", Manufacturer="ECS International", Operating Temperature Range="- 10 C to + 70 C", Package / Case=HC-49/US, Supplier Part Number 1=X1103-ND, Tolerance="30 PPM", Brand=ECS, Category=Crystals, ComponentLink1Description=http://www.ecsxtal.com/store/pdf/partnumber4.pdf?src-supplier=Digi-Key, ComponentLink1URL=http://www.ecsxtal.com/store/pdf/partnumber4.pdf?src-supplier=Digi-Key, Dimensions="4.65 mm W x 11.35 mm L x 3.5 mm H", Factory Pack Quantity=200, Manufacturer Part Number=ECS-160-20-4X, Mounting Style="Through Hole", Packaging=Bulk, Pricing 1="1=0.69, 10=0.575, 50=0.5176, 100=0.46, 500=0.437, 1000=0.368, 2500=0.345, 5000=0.3335, 10000=0.322 (USD)", Product Category=Crystals, RoHS=Details, Series=HCS49USX, Stock 1=5001, Supplier 1=Digi-Key, Termination Style=Radial, Type="Quartz Crystals"

## Via types
v1: diameter 30, hole 20, Top Layer to Bottom Layer, tented both sides, 63 vias

## Nets (pads, with @x,y where several pads share a name; then routed paths per layer and width w, separated by ;. In a path a pad name is that pad's centre, name@x,y a point inside that pad or via, vN(x,y) a via of type N, cw(c..) or ccw(c..) an arc to the next point about the centre after c; other vN are vias at no path point)
+3V3: C6.1 J7.5 U3.12 | length 1032.3
  Top Layer w30: J7.5 170,1300 240,1370 240,1640 320,1720 C6.1 799.61,1720 U3.12
+5V: C1.1 C2.2 C7.2 C8.2 D3.2 J1.3 J4.3 J7.4 J10.1 R1.2 R2.2 R3.2 R5.2 S1.1 U1.4 U1.6 U1.18 U2.14 U4.14 | length 9788
  Top Layer w15: 240,2020 R5.2 242.5,2067.5 437.5,2067.5 R1.2 ; C1.1 902.2,543.23 U2.14 ; U4.14 1786.77,696.77
  Top Layer w20: v1(200,1940) 210,1940 240,1970 240,2020 ; 640,1180 R2.2 ; 830,1185 904.5,1185 909.5,1180 U1.4 ; 862.99,1117.01 865,1115 904.5,1115 906.51,1117.01 U1.6 ; U1.18 1425.51,1085.51 C7.2 ; 1380,350 v1(1590,350) ; v1(1590,420) 1830,420 1905,495 1905,644.5 1852.73,696.77 ; 1786.77,696.77 1822.2,696.77 C8.2
  Top Layer w30: D3.2 390,350 334.57,405.43 334.57,545.43 ; 862.99,1117.01 830,1150 830,1180 640,1180 340,1180 270,1250 150,1250 J7.4 100,1190 230,1060 230,650 334.57,545.43 ; C1.1 830,545.43 ; 1380,350 890,350 830,410 830,545.43 ; C7.2 1510,1090 1550,1130 1550,1190 1590,1230 1700,1230 1750,1180 J10.1 ; R3.2 1700,2200 J4.3 ; 334.57,545.43 830,545.43
  Bottom Layer w20: 160,1940 v1(200,1940) ; 1400,810 1400,704.64 1590,514.64 v1(1590,420) v1(1590,350)
  Bottom Layer w30: J7.4 110,1200 160,1250 160,1940 160,2320 262.83,2422.83 S1.1 657.17,2422.83 840,2240 J4.3 J1.3 ; 1400,810 1420,830 1600,830 1690,920 1690,1090 J10.1
\AT_SEL: Q1.3 R3.1 U2.4 | length 2008.9
  Top Layer w10: R3.1 1700,1850 v1(1840,1710)
  Top Layer w15: U2.4 1270,620 1430,780 v1(1450,780) ; R3.1 1816.34,1980.94 Q1.3
  Bottom Layer w20: v1(1450,780) 1710,780 1850,920 1850,1700 v1(1840,1710)
AT_SEL: J4.2 Q1.1 U2.1 U2.5 | length 3037.6
  Top Layer w10: U2.1 1166.77,543.23 1146.77,563.23 1146.77,626.77 1165.59,645.59 U2.5
  Top Layer w15: U2.1 1246.77,543.23 1280,510 1280,414.04 1306.54,387.5 1837.5,387.5 1932.5,482.5 1932.5,1942.58 Q1.1 1839.69,2260.31 1760,2340 J4.2
BUSYLED: D1.2 U1.24 | length 279.5
  Top Layer w10: U1.24 1325.51,1274.49 1340,1288.98 1340,1450 1370,1480 D1.2
CP: J1.2 U1.25 | length 1396.9
  Top Layer w20: U1.25 v1(1224.88,1440) ; v1(1930,2090) 2020,2180 2020,2280 J1.2
  Bottom Layer w20: v1(1224.88,1440) 1874.88,2090 v1(1930,2090)
EN_AB: U1.11 U4.1 U4.4 | length 1381.2
  Top Layer w10: v1(910,910) 1010,910 1067.4,967.4 U1.11 ; v1(1350,450) 1350,590 1380,620 U4.4 ; U4.4 1570,620 1580,630 1580,680 1563.23,696.77 U4.1
  Bottom Layer w10: v1(910,910) 910,858.28 1318.28,450 v1(1350,450)
EN_MB: U1.13 U4.10 U4.13 | length 1544.1
  Top Layer w10: v1(1130,760) 1130,998.5 U1.13 ; v1(1380,420) 1440.71,420 1500.71,480 1826.36,480 1845,498.64 1845,576.72 1827.31,594.41 U4.10 1705.59,594.41 1680,620 1680,650 1701.18,671.18 U4.13
  Bottom Layer w10: v1(1130,760) 1130,712.43 1380,462.43 v1(1380,420)
EN_RST: U1.12 U2.10 | length 445.2
  Top Layer w10: U2.10 1055.59,645.59 1098.9,688.9 U1.12
GND: C1.2 C2.1 C4.1 C5.1 C6.2 C7.1 C8.1 J1.1 J4.1 J6.7 J7.2 J7.3 J10.3 Q1.2 Q2.2 Q3.2 R4.2 R8.1 R9.1 R10.1 R11.1 R12.1 R13.1 S2.2 U1.3 U1.5 U1.21 U2.7 U3.13 U3.21 U3.22 U4.7 | length 2057.5
  Top Layer w15: v1(424.57,824.57) C4.1 ; v1(425.43,714.57) C5.1 ; v1(770,1020) 770,1050 ; v1(880,1230) 897.5,1212.5 915.89,1212.5 916.89,1211.5 U1.3 ; v1(890,1150) 891.5,1148.5 U1.5 ; U2.7 1236.77,696.77 1250,710 1250,740 1240,750 v1(1210,750) ; U1.21 v1(1350,1180) ; v1(1450,520) 1473.23,543.23 U4.7 ; v1(1800,2080) 1800.32,2079.68 Q1.2
  Top Layer w20: v1(100,2190) R4.2 119.06,2280 Q3.2 ; v1(360,2280) Q2.2 ; C4.1 C4.1@510.63,823.94 ; v1(530,290) R12.1 ; v1(570,2150) R9.1 ; C6.2 v1(680,1860) ; v1(720,1630) 751.34,1661.34 U3.13 ; 770,1050 C2.1 ; C1.2 v1(974.57,474.57) ; v1(1200,1530) 1220,1530 1256.69,1566.69 U3.21 ; U3.22 1361.34,1661.34 v1(1410,1710) ; v1(1400,2310) 1400.47,2310.47 R8.1 ; C7.1 v1(1499.13,1160.87) ; R11.1 v1(1549.53,1260.47) ; v1(1470,1420) R10.1 ; R13.1@1550,2130 1550,2150 1570,2170 v1(1610,2170) ; v1(1760.25,746.45) 1783.8,770 1824.57,770 C8.1
KEY34: R7.2 U2.3 U2.6 | length 2514.2
  Top Layer w10: U2.3 1314.41,594.41 1340,620 v1(1340,630) ; U2.6 v1(1268.82,671.18) 1407.64,810 1482.43,810
  Top Layer w15: 1482.43,810 1770,810 1875,915 1875,1595 1650,1820 1650,2260.47 R7.2
  Bottom Layer w10: v1(1268.82,671.18) 1298.82,671.18 v1(1340,630)
M_KEY34: U1.2 U2.2 | length 1564.4
  Top Layer w10: v1(720,1250) 822.43,1250 842.43,1270 882.43,1270 909.43,1242.99 U1.2 ; U2.2 1253,568.82 1320,501.82 v1(1320,420)
  Bottom Layer w10: v1(720,1250) 720,990 1290,420 v1(1320,420)
MISO: J9.1 U1.16 | length 856.6
  Top Layer w15: U1.16 1224.88,905.12 1255,875 1645,875 1690,920 1690,1110 1650,1150 J9.1
MOSI: J10.2 U1.15 | length 965.2
  Top Layer w15: U1.15 1193.39,901.26 1244.64,850 1760,850 1830,920 1830,1000 1780,1050 J10.2
NetC3_1: C3.1 U2.8 | length 91.6
  Top Layer w10: C3.1 924.09,696.77 U2.8
NetD1_1: D1.1 R10.2 | length 90.2
  Top Layer w10: D1.1 1469.53,1539.06 R10.2
NetD2_1: D2.1 R11.2 | length 90.2
  Top Layer w10: D2.1 1469.53,1320 R11.2
NetD3_1: D3.1 R12.2 | length 110.2
  Top Layer w10: D3.1 529.53,409.06 R12.2
NetD4_1: D4.1 R13.2 | length 100
  Top Layer w10: D4.1@1450,2070 R13.2@1550,2070
NetQ2_1: Q2.1 Q3.1 R4.1 S1.4 | length 564.3
  Top Layer w10: S1.4 R4.1 260,2320 ; Q3.1 260,2320 ; Q2.1 460,2300 400,2360 300,2360 260,2320
NetR6_1: R6.1 R9.2 U3.2 | length 219.1
  Top Layer w10: R9.2@570,2310 U3.2@789.06,2310
NetR7_1: R7.1 R8.2 U3.34 | length 300.2
  Top Layer w10: U3.34 1399.53,2370 1400,2369.53 R8.2 R7.1
RESETBT: Q2.3 R1.1 U1.9 U3.11 | length 2580.5
  Top Layer w10: v1(370,2150) 390.94,2129.06 R1.1 ; R1.1@440.31,2129.37 Q2.3 ; v1(910,960) 930,940 980,940 1004.41,964.41 U1.9
  Top Layer w15: R1.1 440.31,2129.37 440.94,2130 540,2130 714.15,1955.85 714.15,1835.85 775.56,1774.44 U3.11@794.99,1774.44
  Bottom Layer w10: v1(370,2150) 313.5,2093.5 313.5,1546.5 500,1360 842.43,1360 935,1267.43 935,985 v1(910,960)
RESETM: J9.3 Q3.3 R5.1 U1.29 | length 2782
  Top Layer w15: R5.1 269.06,2100 v1(370,2100) ; R5.1@240.31,2129.06 Q3.3
  Top Layer w20: v1(960,1470) 1040,1470 1098.9,1411.1 U1.29
  Bottom Layer w15: v1(960,1470) 984.64,1470 1020,1434.64 1020,904.04 1054.04,870 1550,870 J9.3
  Bottom Layer w20: v1(370,2100) 370,1790 690,1470 v1(960,1470)
RST: C3.2 J7.6 | length 1558.7
  Top Layer w15: J7.6 v1(200,1400) ; v1(200,1190) 210,1190 262.5,1137.5 262.5,667.5 340,590 790,590 850,650 C3.2
  Bottom Layer w15: v1(200,1190) v1(200,1400)
RxA: J5.1 U4.3 | length 979
  Top Layer w10: v1(1440,740) 1440,680 1474.41,645.59 U4.3
  Bottom Layer w10: v1(1440,740) 1440,700 1940,200 J5.1@1980,200 ; J5.1 J5.1@1980,200 ; J5.1@1980,200 1975.47,204.53 1984.53,204.53 J5.1@1980,200
RxB: J3.2 R6.2 U4.6 U4.8 | length 4156.2
  Top Layer w10: v1(1410,500) 1410,537.57 1441.24,568.82 U4.6 1621.18,568.82 1646.77,543.23 U4.8
  Top Layer w20: v1(288.5,510) 288.5,292 340.5,240 900,240 950,290 v1(1000,290) ; v1(680,2190) R6.2
  Bottom Layer w10: J3.2 1312.37,210 1410,307.63 v1(1410,500)
  Bottom Layer w20: v1(288.5,510) 288.5,2158 320.5,2190 v1(680,2190) ; v1(1000,290) 1020,290 J3.2
RxM: J2.2 U1.30 U4.11 | length 2733.7
  Top Layer w10: U1.30 U1.30@1068.9,1331.1 ; v1(1540,420) 1580,460 1834.64,460 1865,490.36 1865,585 1830,620 U4.11
  Top Layer w20: v1(900,1430) 1022.43,1430 1067.4,1385.03 U1.30
  Bottom Layer w10: 1239.29,830 1540,529.29 v1(1540,420)
  Bottom Layer w15: 990,960 990,865.36 1025.36,830 1239.29,830
  Bottom Layer w20: J2.2 480,1570 620,1430 v1(900,1430) 930,1430 990,1370 990,960
SAVELED: D2.2 U1.23 | length 107.4
  Top Layer w10: U1.23 1362.05,1242.99 D2.2
SCK: J9.2 U1.17 | length 384.8
  Top Layer w15: U1.17 1355.98,1054.02 1400,1010 1590,1010 J9.2
STATE: U2.9 U3.25 U3.32 | length 1949.9
  Top Layer w10: U2.9 1027.87,671.18 1060,703.31 v1(1060,910) ; U3.32@1300,2250 1250,2250 1220,2220 1220,1890 1270,1840 v1(1370,1840)
  Bottom Layer w15: v1(1060,910) 1060,1010 1190,1140 1190,1460 1370,1640 v1(1370,1840)
STATELED: D4.2 U3.24 U3.31 | length 694.9
  Top Layer w10: U3.24 1359.45,1779.45 1400,1820 1400,2192.83 ; U3.31 1400,2192.83 ; D4.2@1450,2130 1450,2180 1437.17,2192.83 1400,2192.83
SW: R2.1 S2.3 U1.26 | length 897
  Top Layer w20: S2.3@520,1322.83 507.17,1310 S2.3 690,1310 885,1505 1085,1505 1193.39,1396.61 U1.26
TxA: J5.2 U4.5 | length 926.1
  Top Layer w10: v1(1420,590) 1418.81,590 1414.41,594.41 U4.5 ; v1(1760,300) J5.2
  Bottom Layer w10: v1(1420,590) 1450,590 1510,530 1510,330 1540,300 v1(1760,300)
TxB: J3.1 U3.1 U4.2 U4.12 | length 5220.6
  Top Layer w10: J3.1 1110,320 1602.43,320 1632.43,350 v1(1860,350) ; v1(1510,740) 1482.43,740 1470,727.57 1470,680 1478.82,671.18 U4.2 ; U4.12 1854.41,645.59 v1(1870,630)
  Top Layer w20: v1(240.31,510) 240.31,289.69 320,210 J3.1 ; v1(450,2360) 460,2370 770,2370
  Bottom Layer w10: v1(1510,740) 1700,740 1810,630 v1(1870,630) 1870,360 v1(1860,350)
  Bottom Layer w20: v1(240.31,510) 240.31,2260.31 340,2360 v1(450,2360)
TxM: J2.1 U1.31 U4.9 | length 2677
  Top Layer w10: v1(1380,560) 1380,480 1400,460 1452.43,460 1492.43,500 1808.08,500 1825,516.92 1825,553.43 1809.62,568.82 U4.9
  Top Layer w20: v1(830,1390) 1020,1390 1035.91,1374.09 U1.31
  Bottom Layer w10: 1218.18,800 1241.01,800 1380,661.01 v1(1380,560)
  Bottom Layer w15: 960,950 960,860 1020,800 1218.18,800
  Bottom Layer w20: J2.1 570,1390 v1(830,1390) 870,1390 960,1300 960,950
XT1: C4.2 U1.7 Y1.2 | length 618.5
  Top Layer w15: 840,1030 895.51,1085.51 U1.7
  Top Layer w20: C4.2 650.63,895.43 Y1.2 806.06,866.06 840,900 840,1030
XT2: C5.2 U1.8 Y1.1 | length 731.6
  Top Layer w15: 875,965 875,1025 904.02,1054.02 U1.8
  Top Layer w20: C5.2 649.76,643.7 Y1.1 733.94,673.94 875,815 875,965
pads on no net: J5.3 J5.4 J5.5 J5.6 J5.7 J5.8 J6.1 J6.2 J6.3 J6.4 J6.5 J6.6 J6.8 J7.1 J8.1 J8.2 J8.3 J8.4 J8.5 J8.6 S1.2 S1.3 S2.1 S2.4 U1.1 U1.10 U1.14 U1.19 U1.20 U1.22 U1.27 U1.28 U1.32 U2.11 U2.12 U2.13 U3.3 U3.4 U3.5 U3.6 U3.7 U3.8 U3.9 U3.10 U3.14 U3.15 U3.16 U3.17 U3.18 U3.19 U3.20 U3.23 U3.26 U3.27 U3.28 U3.29 U3.30 U3.33

## Polygon pours and split planes (outlines as drawn)
GND on Bottom Layer "Bottom Layer-No Net" (solid, remove dead copper, pour order 4): 30,2670 700,2670 700,2460 810,2350 1300,2350 1400,2450 1400,2670 2070,2670 2070,130 1580,130 1480,30 220,30 120,130 30,130

## Keep-outs
Keep-Out Layer:
  the board outline again, w7.87

## Silkscreen, mask and mechanical layers (free items; w line width, h text height)
Top Overlay:
  text "RESET" at 420,2590 h40
  text "notAT" at 1640,2540 h40
  text "Prog" at 1880,2540 h40
  text "AT" at 1700,2100 h40
  text "Comm" at 1880,2100 h40
  text "STATE" at 1420,1960 h40
  text "AREF" at 1800,1750 h30
  text "Bluetooth Programmer  / Shileld v.1.0" at -30,1690 h40
  text "GND" at 1830,1650 h30
  text "13" at 1860,1550 h30
  text "BUSY" at 1540,1500 h40
  text "TxM RxM" at 310,1460 h40
  text "12" at 1860,1440 h30
  text "RST" at 190,1390 h30
  text "11" at 1860,1340 h30
  text "3V3" at 190,1290 h30
  text "SAVING" at 1540,1280 h40
  text "10" at 1860,1240 h30
  text "5V" at 200,1190 h30
  text "9" at 1870,1140 h30
  text "GND" at 190,1090 h30
  text "8" at 1870,1040 h30
  text "GND" at 190,990 h30
  text "INIT" at 290,940 h40
  text "Vin" at 190,890 h30
  text "7" at 1890,880 h30
  text "ISPM" at 1590,830 h40
  text "6" at 1890,780 h30
  text "A0" at 190,690 h30
  text "5" at 1890,690 h30
  text "A1" at 190,590 h30
  text "4" at 1890,590 h30
  text "A2" at 190,490 h30
  text "3" at 1890,490 h30
  text "16MHz" at 590,480 h40
  text "A3" at 190,390 h30
  text "2" at 1890,390 h30
  text "A4" at 190,290 h30
  text "TxA" at 1800,280 h40
  text "ON" at 390,230 h40
  text "A5" at 190,190 h30
  text "RxA" at 1800,180 h40
  text "Nikola / Cvetkovic / 2016/0292" at 1310,150 h35
  text "TxB RxB" at 920,90 h40
  text "PWM pins: / 3, 5, 6,  / 9,10, 11" at 530,80 h30

## Text inside footprints (layer, text, board x,y; h text height)
J9: Top Overlay "1" at 1540,1150 h35